# EAGLE board alim (EAGLE 4.16)
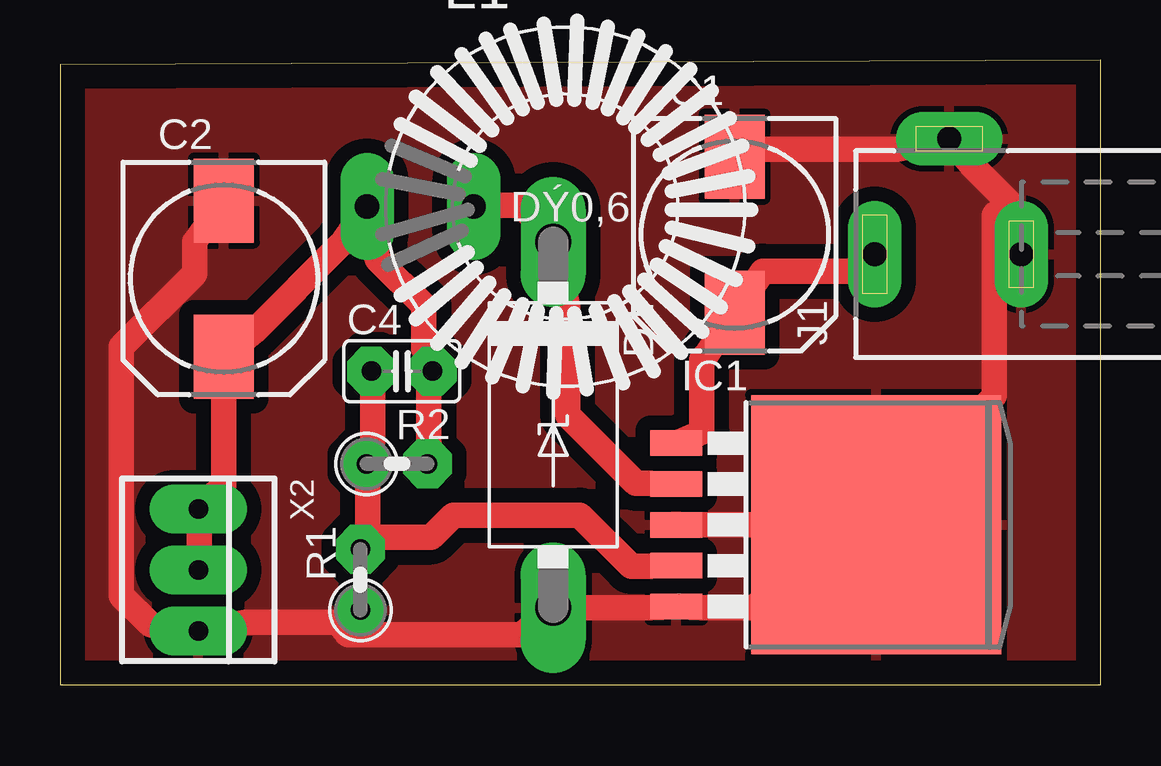
[diagram p0: board, top side]

Size 43.36 x 26.04 mm. Coordinates in mm from the lower left corner, seen from the top.
Outline: 0,0 43.36,0 43.36,26.04 0,25.83 0,0
Copper layers (1*16): Top 0.035mm / dielectric 1.5mm / Bottom 0.035mm
Design rules "mio2": minimum track width 42mil, minimum drill 24mil, track to track 24mil, track to pad 24mil, pad to pad 24mil, via to via 24mil, smd to smd 24mil, copper to edge 40mil, drill to drill 8mil, minimum pad ring 24mil, minimum via ring 24mil, stop-mask expansion 4mil, vias tented up to drill 0mil, thermal gap 10mil

## Footprints (pad centres in the part's own frame; a part is rotated, then mirrored left to right if it is on the bottom)
140CLH-0810 = smd 3.5 x 2.5: + 3.25,0; - -3.25,0
C025-025X050 = drill 0.813 octagon: 1 -1.27,0; 2 1.27,0
C4111-15 = drill 1.499 long: A 7.62,0; C -7.62,0
TO263-5 = smd 1.067 x 2.159: 1 -3.404,-5.791; 2 -1.702,-5.791; 3 0,-5.791; 4 1.702,-5.791; 5 3.404,-5.791 | smd 10.8 x 10.41: 6 0,2.54
DCJ0202 = drill 1 pad 2 long: 1 0,3.1; 2 4.8,0; 3 0,-3
ED16 = drill 1.016 long: 1 -8.255,0; 2 -3.81,0
0207/2V = drill 0.813 octagon: 1 -1.27,0; 2 1.27,0
22-23-2031 = drill 0.813 long: 1 -2.54,0; 2 0,0; 3 2.54,0

## Placement (x,y rotation side)
C1  470u  [140CLH-0810]  28.11,18.76 270 top
C2  220u  [140CLH-0810]  6.83,16.93 270 top
C4  10nF  [C025-025X050]  14.24,13.07 0 top
D1  1N5908  [C4111-15]  20.54,10.83 270 top
IC1  [TO263-5]  31.47,6.67 270 top
J1  DCJ0202  [DCJ0202]  37.05,17.95 90 top
L1  ED16  [ED16]  21.05,19.93 0 top
R1  1k  [0207/2V]  12.52,4.38 90 top
R2  3k  [0207/2V]  14.04,9.21 0 top
X2  22-23-2031  [22-23-2031]  5.76,4.79 270 top

## Library data of the parts
C1 C2 C4 R1 R2 = rcl
D1 = diode
IC1 = linear
J1 = con-jack
L1 = inductors
X2 = con-molex

## Nets
GND: C1.- C2.- D1.A IC1.3 IC1.5 IC1.6 J1.2 J1.3 R1.1 X2.3
N$1: C2.+ C4.2 L1.1 R2.2 X2.1 X2.2
N$3: C1.+ IC1.1 J1.1
N$4: D1.C IC1.2 L1.2
N$6: C4.1 IC1.4 R1.2 R2.1

## Tracks (layer width: path | path; a pad name or v marks a point on that pad's centre or on a via)
GND
  Top 1.067: C2.- 5.61,18.45 5.61,17.13 2.56,14.08 2.56,3.72 3.78,2.5 X2.3 7.74,2.6 11.6,2.6 | 11.6,2.6 R1.1 | C1.- 29.28,22.31 34.87,22.31 J1.2 37.92,21.7 39.54,20.08 J1.3 39.14,19.67 39.03,19.67 38.93,19.57 38.93,12.05 IC1.6 | IC1.6 28.87,3.21 26.74,3.21 IC1.5 24.61,3.21 D1.A 19.22,2.1 12.01,2.1 11.91,2.2 11.6,2.6 | IC1.6 IC1.3
  pour Top: 0.43,25.26 42.69,25.26 42.69,0.47 0.43,0.47
N$1
  Top 1.067: R2.2 15.36,10.12 15.36,12.15 C4.2 15.16,13.98 15.16,15.81 13.23,17.74 L1.1 11.7,18.35 8.05,14.69 C2.+ 6.83,8.29 X2.1 5.81,6.36 5.81,5.75 X2.2
N$3
  Top 1.067: IC1.1 26.74,10.53 26.74,13.58 26.94,13.78 C1.+ 29.28,17.23 32.94,17.23 J1.1
N$4
  Top 1.067: IC1.2 24.61,8.39 24,8.39 21.15,11.24 21.15,15.81 D1.C 19.22,19.98 18.31,19.98 L1.2
N$6
  Top 1.067: IC1.4 24.61,4.94 23.79,4.94 21.66,7.07 16.38,7.07 15.46,6.16 13.43,6.16 R1.2 12.82,6.57 12.82,8.29 R2.1 13.03,10.12 13.03,12.15 C4.1